# EAGLE board HearingAid (2) (EAGLE 9.1.3)
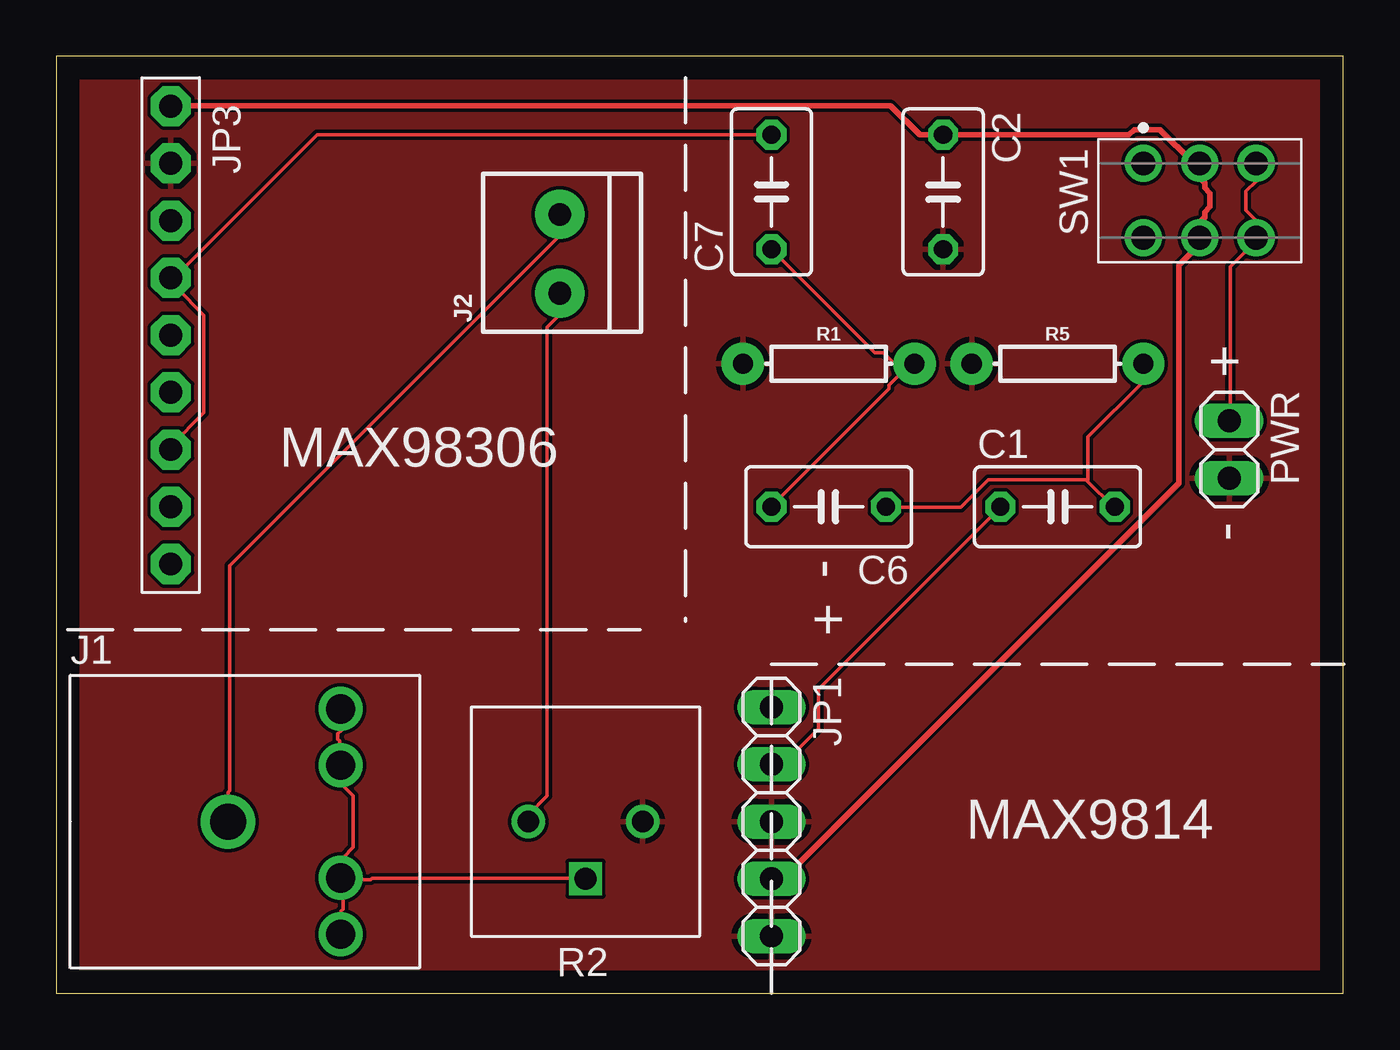
[diagram p0: board, top side]
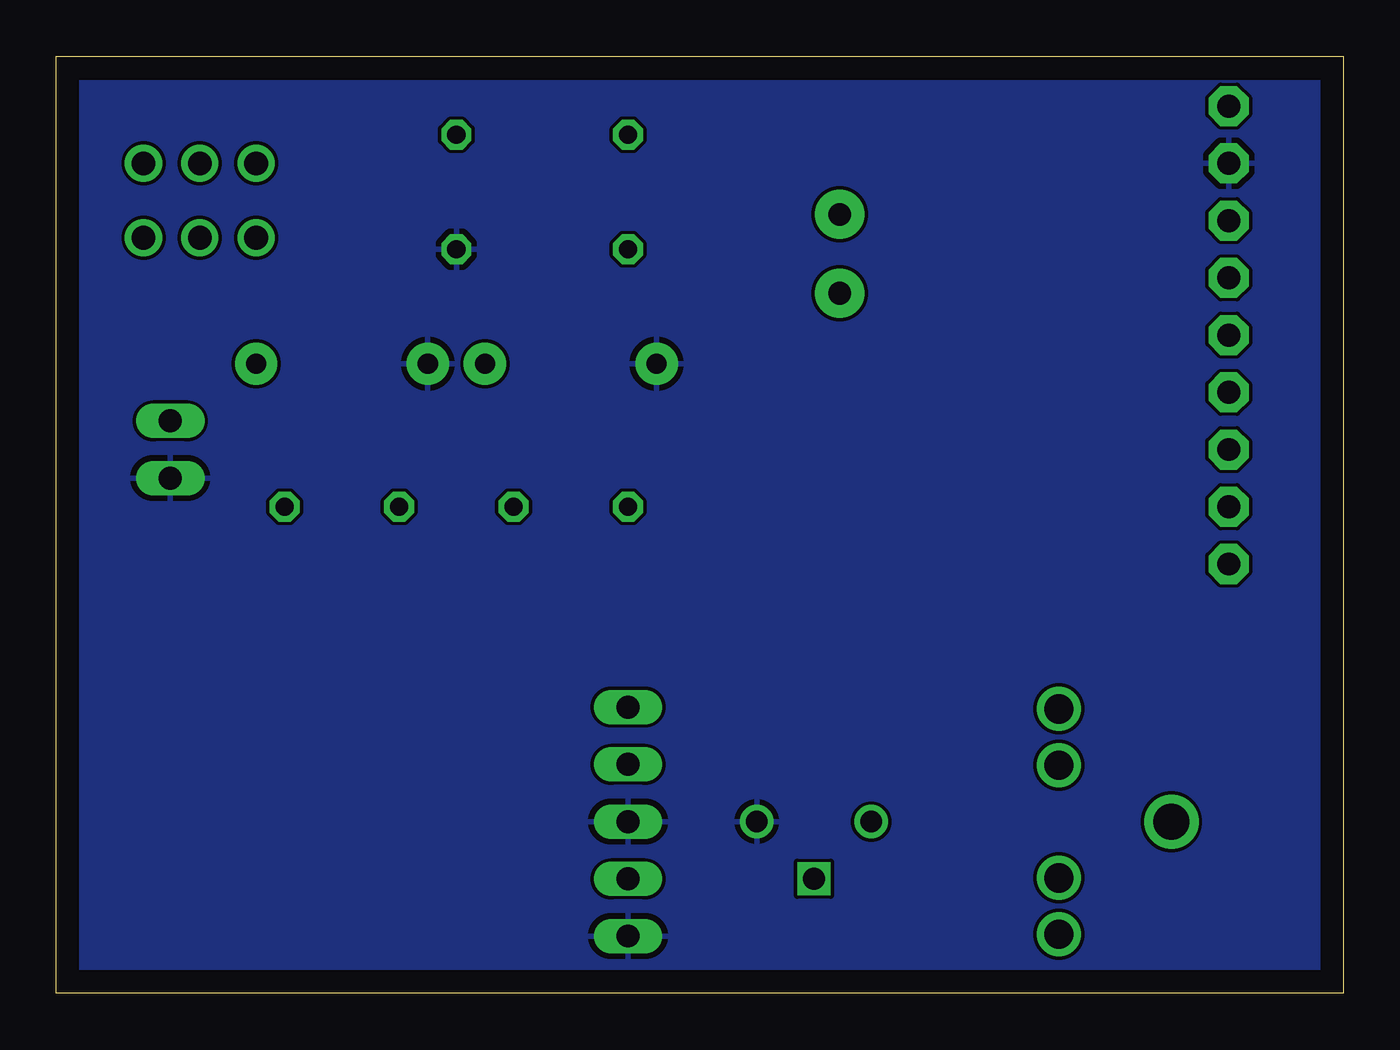
[diagram p1: board, bottom side, seen from below]

Size 57.13 x 41.58 mm. Coordinates in mm from the lower left corner, seen from the top.
Outline: 0,0 57.13,0 57.13,41.58 0,41.58 0,0
Copper layers (1*16): Top 0.035mm / dielectric 1.5mm / Bottom 0.035mm
Design rules "default": minimum track width 6mil, minimum drill 0.35mm, track to track 6mil, track to pad 6mil, pad to pad 6mil, via to via 6mil, smd to smd 6mil, copper to edge 40mil, drill to drill 6mil, minimum pad ring 10mil, minimum via ring 8mil, stop-mask expansion 4mil, vias tented up to drill 0mil, thermal gap 10mil
Net classes: 1 pwr: width 0.254 mm

## Footprints (pad centres in the part's own frame; a part is rotated, then mirrored left to right if it is on the bottom)
C050-035X075 = drill 0.813 octagon: 1 -2.54,0; 2 2.54,0
STX-3120-5B = drill 1.6: 1 0,0 | drill 1.3: 2 5,5; 3 5,2.5; 4 5,-2.5; 5 5,-5
TERMBLOCK_1X2-3.5MM = drill 1 pad 2.184: 1 1.8,0; 2 -1.7,0
1X05 = drill 1.016 long: 1 -5.08,0; 2 -2.54,0; 3 0,0; 4 2.54,0; 5 5.08,0
1X09-BIG = drill 1.016 pad 1.778 octagon: 1 -10.16,0; 2 -7.62,0; 3 -5.08,0; 4 -2.54,0; 5 0,0; 6 2.54,0; 7 5.08,0; 8 7.62,0; 9 10.16,0
1X02 = drill 1.016 long: 1 -1.27,0; 2 1.27,0
AXIAL-0.3 = drill 0.9 pad 1.88: P$1 -3.81,0; P$2 3.81,0
3-PRONG-TRIMPOT = drill 0.965: 1 2.54,2.54; 3 2.54,-2.54 | drill 0.965 square: 2 0,0
HDRVR6W60P330X250_2X3_900X330X350B = drill 1.048 pad 1.649: 1 0,0; 2 2.5,0; 3 5,0; 4 5,-3.3; 5 2.5,-3.3; 6 0,-3.3

## Placement (x,y rotation side)
C1  1k pF  [C050-035X075]  44.45,21.59 0 top
C2  1 uF  [C050-035X075]  39.37,35.56 270 top
C6  1k pF  [C050-035X075]  34.29,21.59 180 top
C7  16 uF  [C050-035X075]  31.75,35.56 90 top
J1  STX-3120-5B  [STX-3120-5B]  7.62,7.62 0 top
J2  [TERMBLOCK_1X2-3.5MM]  22.35,32.77 90 top
JP1  [1X05]  31.75,7.62 270 top
JP3  [1X09-BIG]  5.08,29.21 270 top
PWR  [1X02]  52.07,24.13 270 top
R1  6.8k  [AXIAL-0.3]  34.29,27.94 0 top
R2  10K  [3-PRONG-TRIMPOT]  23.5,5.08 90 top
R5  6.8k  [AXIAL-0.3]  44.45,27.94 0 top
SW1  JS202011CQN  [HDRVR6W60P330X250_2X3_900X330X350B]  48.26,36.83 0 top

## Library data of the parts
C1 C2 C6 C7 JP3 = adafruit
J1 R2 SW1 = bhamla
J2 = microbuilder
JP1 PWR = pinhead
R1 R5 = SparkFun-Resistors; PROD_ID: RES-12183

## Nets
AR: JP1.1
GND: C2.2 JP1.3 JP1.5 JP3.2 PWR.2 R1.P$1 R2.3 R5.P$1
N$2: C1.2 C6.1 R5.P$2
N$4: J1.2 J1.3 J1.4 J1.5 R2.2
N$5: J2.2 R2.1
N$6: J1.1 J2.1
N$7: PWR.1 SW1.3 SW1.4
N$8: C6.2 C7.1 R1.P$2
N$10: C7.2 JP3.4 JP3.7
OUT: C1.1 JP1.2
VCC [pwr]: C2.1 JP1.4 JP3.1 SW1.2 SW1.5

## Tracks (layer width: path | path; a pad name or v marks a point on that pad's centre or on a via)
GND
  pour Top: 0,40.64 57.15,40.64 57.15,0 0,0
  pour Bottom: 0,40.64 0,0 57.15,0 57.15,40.64
N$2
  Top 0.152: 45.76,22.75 46.94,21.57 C1.2 | 45.76,22.75 45.72,22.78 41.38,22.78 40.16,21.57 36.88,21.57 C6.1 | R5.P$2 48.23,27.89 48.23,27.13 45.8,24.69 45.8,22.78 45.76,22.75
N$4
  Top 0.152: J1.2 12.65,12.57 12.65,11.66 12.5,11.51 12.5,11.28 12.57,11.2 12.57,10.13 J1.3 12.65,10.06 12.65,9.3 13.18,8.76 13.18,6.48 12.72,6.02 12.72,5.18 J1.4 | 12.72,5.11 12.65,5.11 J1.4 | 12.72,5.11 13.56,5.11 13.64,5.03 13.95,5.03 14.02,5.11 23.47,5.11 R2.2 | 12.72,5.11 12.72,3.73 12.65,3.66 12.65,2.67 J1.5 | 12.72,5.11 J1.4
N$5
  Top 0.152: R2.1 20.95,7.92 21.79,8.76 21.79,29.57 22.33,30.1 22.33,31.01 J2.2
N$6
  Top 0.152: J1.1 7.62,8.91 7.7,8.99 7.7,18.97 22.33,33.6 22.33,34.52 J2.1
N$7
  Top 0.152: PWR.1 52.12,25.45 52.12,32.23 53.19,33.3 53.19,33.53 SW1.4 53.26,33.6 53.26,34.29 52.81,34.75 52.81,35.59 53.26,36.04 53.26,36.8 SW1.3
N$8
  Top 0.152: 37.57,27.58 37.87,27.89 38.1,27.89 R1.P$2 37.57,27.58 | 37.57,27.58 36.96,26.98 36.96,26.82 31.77,21.64 C6.2 | 37.57,27.58 36.73,28.42 36.35,28.42 31.77,32.99 C7.1
N$10
  Top 0.152: C7.2 31.7,38.1 11.58,38.1 5.26,31.77 5.11,31.77 JP3.4 5.33,31.77 5.33,31.32 6.55,30.1 6.55,25.76 5.11,24.31 5.11,24.16 JP3.7
OUT
  Top 0.152: C1.1 41.91,21.57 33.83,13.49 33.83,11.73 32.31,10.21 31.77,10.21 JP1.2
VCC
  Top 0.254: JP1.4 31.77,5.11 32.31,5.11 49.84,22.63 49.84,32.31 50.75,33.22 SW1.5 50.83,33.6 50.83,34.29 50.98,34.44 50.98,34.67 51.21,34.9 51.21,35.51 50.98,35.74 50.98,35.97 50.83,36.12 50.83,36.73 SW1.2 50.75,36.88 50.44,36.88 49,38.33 47.85,38.33 47.62,38.1 39.4,38.1 C2.1 39.32,38.1 38.33,38.1 37.03,39.4 5.11,39.4 JP3.1

## Text on the board
tNames: + | MAX98306 | - | - | + | MAX9814